# EAGLE board mouthbrain.brd.BASE.36720 (EAGLE 6.4.1)
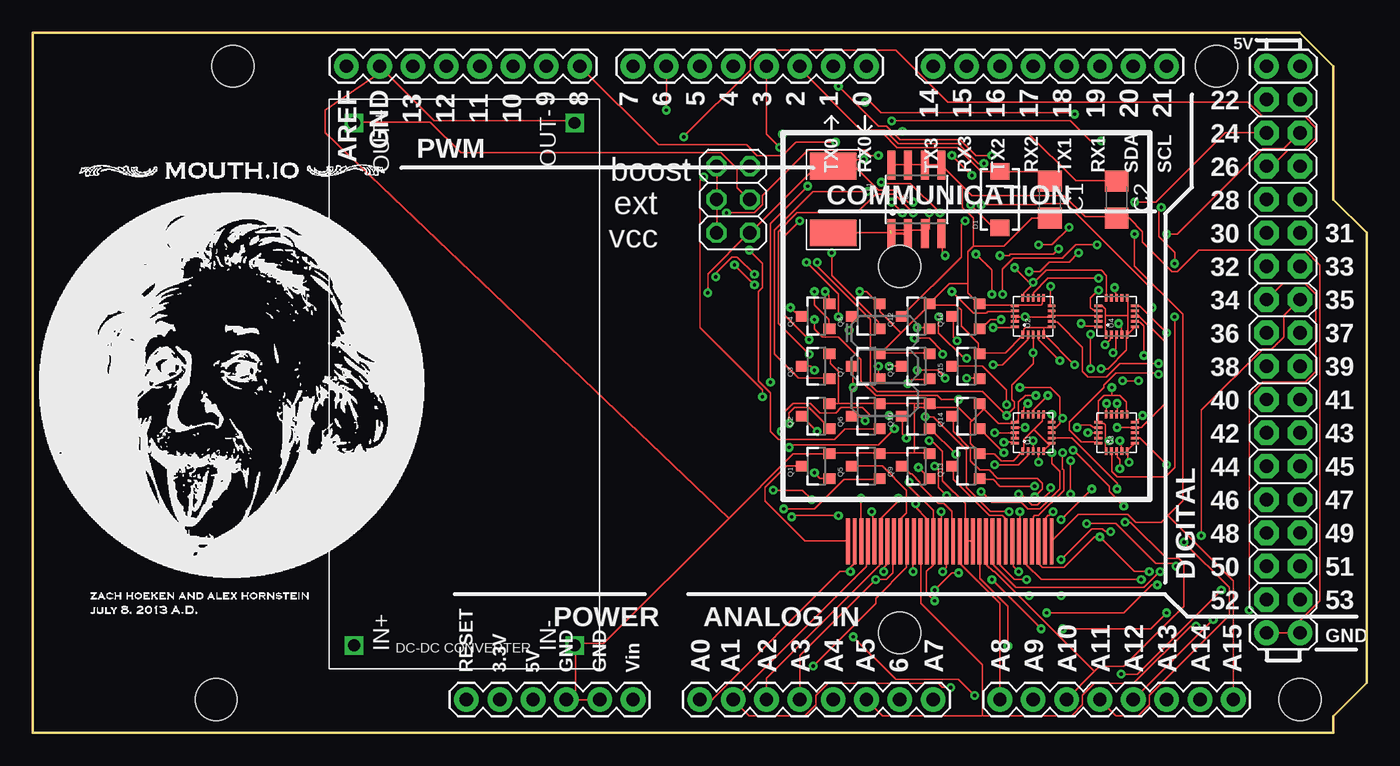
[diagram p0: board, top side]
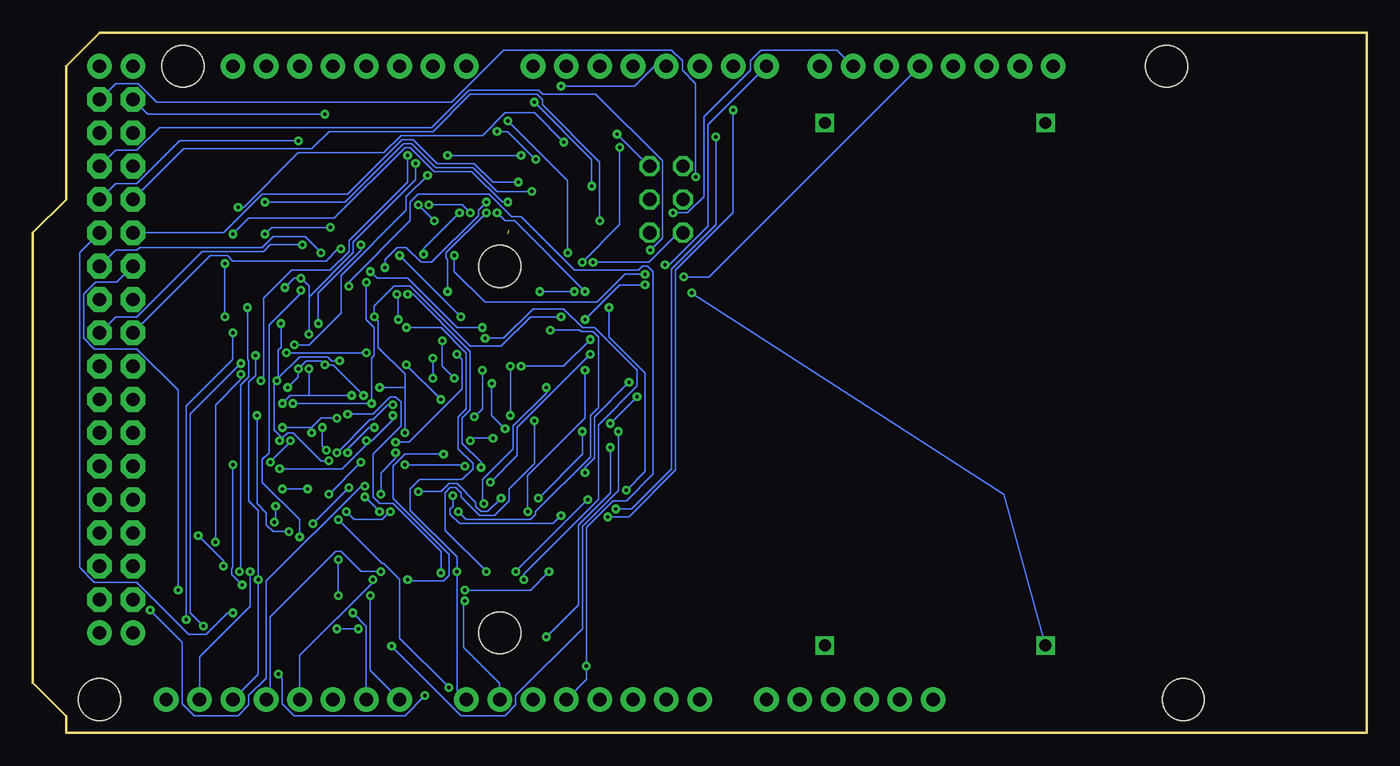
[diagram p1: board, bottom side, seen from below]

Size 101.6 x 53.34 mm. Coordinates in mm from the lower left corner, seen from the top.
Copper layers (1*16): Top 0.035mm / dielectric 1.5mm / Bottom 0.035mm
Design rules "default *": minimum track width 4mil, minimum drill 10mil, track to track 6mil, track to pad 6mil, pad to pad 6mil, via to via 6mil, smd to smd 6mil, copper to edge 40mil, drill to drill 8mil, minimum pad ring 10mil, minimum via ring 8mil, stop-mask expansion 4mil, vias tented up to drill 0mil, thermal gap 10mil

## Footprints (pad centres in the part's own frame; a part is rotated, then mirrored left to right if it is on the bottom)
C1206 = smd 1.6 x 1.8: 1 -1.4,0; 2 1.4,0
SMA-DIODE = smd 1.27 x 1.47: A -2.15,0; C 2.15,0
INDUCTOR-1206 = smd 2.032 x 3.556: P$1 -2.54,0; P$2 2.54,0
ARDUINO_MEGA = drill 1.016 pad 1.88: 0 63.5,50.8; 1 60.96,50.8; 2 58.42,50.8; 3 55.88,50.8; 3.3V 35.56,2.54; 4 53.34,50.8; 5 50.8,50.8; 5V@0 38.1,2.54; 5V@1 93.98,50.8; 5V@2 96.52,50.8; 6 48.26,50.8; 7 45.72,50.8; 8 41.656,50.8; 9 39.116,50.8; 10 36.576,50.8; 11 34.036,50.8; 12 31.496,50.8; 13 28.956,50.8; 14 68.58,50.8; 15 71.12,50.8; 16 73.66,50.8; 17 76.2,50.8; 18 78.74,50.8; 19 81.28,50.8; 20 83.82,50.8; 21 86.36,50.8; A0 50.8,2.54; A1 53.34,2.54; A2 55.88,2.54; A3 58.42,2.54; A4 60.96,2.54; A5 63.5,2.54; A6 66.04,2.54; A7 68.58,2.54; A8 73.66,2.54; A9 76.2,2.54; A10 78.74,2.54; A11 81.28,2.54; A12 83.82,2.54; A13 86.36,2.54; A14 88.9,2.54; A15 91.44,2.54; AREF 23.876,50.8; GND@0 40.64,2.54; GND@1 43.18,2.54; GND@2 93.98,7.62; GND@3 96.52,7.62; GND@4 26.416,50.8; RESET 33.02,2.54; VIN 45.72,2.54 | drill 1.016 pad 1.88 octagon: 22 93.98,48.26; 23 96.52,48.26; 24 93.98,45.72; 25 96.52,45.72; 26 93.98,43.18; 27 96.52,43.18; 28 93.98,40.64; 29 96.52,40.64; 30 93.98,38.1; 31 96.52,38.1; 32 93.98,35.56; 33 96.52,35.56; 34 93.98,33.02; 35 96.52,33.02; 36 93.98,30.48; 37 96.52,30.48; 38 93.98,27.94; 39 96.52,27.94; 40 93.98,25.4; 41 96.52,25.4; 42 93.98,22.86; 43 96.52,22.86; 44 93.98,20.32; 45 96.52,20.32; 46 93.98,17.78; 47 96.52,17.78; 48 93.98,15.24; 49 96.52,15.24; 50 93.98,12.7; 51 96.52,12.7; 52 93.98,10.16; 53 96.52,10.16 | hole 3.2: 15.24,50.8; 13.97,2.54; 66.04,35.56; 66.04,7.62; 90.17,50.8; 96.52,2.54
SOT23-3 = smd 0.8 x 0.9: 1 -0.95,-1; 2 0.95,-1; 3 0,1.1
QFN-20 = smd 0.6 x 0.2: 1 -1.4,0.8; 2 -1.4,0.4; 3 -1.4,0; 4 -1.4,-0.4; 5 -1.4,-0.8; 11 1.4,-0.8; 12 1.4,-0.4; 13 1.4,0; 14 1.4,0.4; 15 1.4,0.8 | smd 0.2 x 0.6: 6 -0.8,-1.4; 7 -0.4,-1.4; 8 0,-1.4; 9 0.4,-1.4; 10 0.8,-1.4; 16 0.8,1.4; 17 0.4,1.4; 18 0,1.4; 19 -0.4,1.4; 20 -0.8,1.4
SO08 = smd 0.61 x 2.21: 1 -1.905,-2.616; 2 -0.635,-2.616; 3 0.635,-2.616; 4 1.905,-2.616; 5 1.905,2.616; 6 0.635,2.616; 7 -0.635,2.616; 8 -1.905,2.616
DC-DC-MODULE = drill 0.9 square: IN+ -19.9,8.4; IN- -19.9,-8.4; OUT+ 19.9,8.4; OUT- 19.9,-8.4
FPC-PCB-32 = smd 0.3 x 3.5: P$1 -7.75,0; P$2 -7.25,0; P$3 -6.75,0; P$4 -6.25,0; P$5 -5.75,0; P$6 -5.25,0; P$7 -4.75,0; P$8 -4.25,0; P$9 -3.75,0; P$10 -3.25,0; P$11 -2.75,0; P$12 -2.25,0; P$13 -1.75,0; P$14 -1.25,0; P$15 -0.75,0; P$16 -0.25,0; P$17 0.25,0; P$18 0.75,0; P$19 1.25,0; P$20 1.75,0; P$21 2.25,0; P$22 2.75,0; P$23 3.25,0; P$24 3.75,0; P$25 4.25,0; P$26 4.75,0; P$27 5.25,0; P$28 5.75,0; P$29 6.25,0; P$30 6.75,0; P$31 7.25,0; P$32 7.75,0
2X03 = drill 1.016 octagon: 1 -2.54,-1.27; 2 -2.54,1.27; 3 0,-1.27; 4 0,1.27; 5 2.54,-1.27; 6 2.54,1.27

## Placement (x,y rotation side)
C1  [C1206]  77.47,40.64 270 top
C2  [C1206]  82.55,40.64 270 top
D1  [SMA-DIODE]  73.66,40.64 90 top
L1  [INDUCTOR-1206]  60.96,40.64 270 top
MEGA  ARDUINO-MEGAFULL  [ARDUINO_MEGA]  0,0 0 top
Q1  MOSFET-NCHANNELSMD  [SOT23-3]  59.69,20.32 90 top
Q2  MOSFET-NCHANNELSMD  [SOT23-3]  59.69,24.13 90 top
Q3  MOSFET-NCHANNELSMD  [SOT23-3]  59.69,27.94 90 top
Q4  MOSFET-NCHANNELSMD  [SOT23-3]  59.69,31.75 90 top
Q5  MOSFET-NCHANNELSMD  [SOT23-3]  63.5,20.32 90 top
Q6  MOSFET-NCHANNELSMD  [SOT23-3]  63.5,24.13 90 top
Q7  MOSFET-NCHANNELSMD  [SOT23-3]  63.5,27.94 90 top
Q8  MOSFET-NCHANNELSMD  [SOT23-3]  63.5,31.75 90 top
Q9  MOSFET-NCHANNELSMD  [SOT23-3]  67.31,20.32 90 top
Q10  MOSFET-NCHANNELSMD  [SOT23-3]  67.31,24.13 90 top
Q11  MOSFET-NCHANNELSMD  [SOT23-3]  67.31,27.94 90 top
Q12  MOSFET-NCHANNELSMD  [SOT23-3]  67.31,31.75 90 top
Q13  MOSFET-NCHANNELSMD  [SOT23-3]  71.12,20.32 90 top
Q14  MOSFET-NCHANNELSMD  [SOT23-3]  71.12,24.13 90 top
Q15  MOSFET-NCHANNELSMD  [SOT23-3]  71.12,27.94 90 top
Q16  MOSFET-NCHANNELSMD  [SOT23-3]  71.12,31.75 90 top
U1  MCP4352  [QFN-20]  76.2,22.86 90 top
U2  MCP4352  [QFN-20]  76.2,31.75 90 top
U3  MCP4352  [QFN-20]  82.55,22.86 90 top
U4  MCP4352  [QFN-20]  82.55,31.75 90 top
U5  MOSFET-NCHANNEL-SOIC8  [SO08]  67.31,40.64 0 top
U$1  DC-DC-CONVERTER  [DC-DC-MODULE]  32.87,26.57 90 top
U$2  FPC-0.5-32  [FPC-PCB-32]  69.85,14.61 0 top
VDD  [2X03]  53.34,40.64 90 top

## Library data of the parts
C1 C2 = rcl
D1 L1 MEGA Q1-Q16 U5 = SparkFun
U1-U4 = mouthbrain
U$1 U$2 = Hoektronics
VDD = pinhead

## Nets
!CS1: MEGA.6 U1.2
!CS2: MEGA.7 U2.2
!CS3: MEGA.8 U3.2
!CS4: MEGA.9 U4.2
!RESET: MEGA.2 U1.13 U2.13 U3.13 U4.13
AOUT0: MEGA.A0 U1.10 U$2.P$2
AOUT1: MEGA.A1 U1.7 U$2.P$4
AOUT2: MEGA.A2 U1.17 U$2.P$6
AOUT3: MEGA.A3 U1.20 U$2.P$8
AOUT4: MEGA.A4 U2.10 U$2.P$10
AOUT5: MEGA.A5 U2.7 U$2.P$12
AOUT6: MEGA.A6 U2.17 U$2.P$14
AOUT7: MEGA.A7 U2.20 U$2.P$16
AOUT8: MEGA.A8 U3.10 U$2.P$18
AOUT9: MEGA.A9 U3.7
AOUT10: MEGA.A10 U3.17 U$2.P$22
AOUT11: MEGA.A11 U3.20 U$2.P$24
AOUT12: MEGA.A12 U4.10 U$2.P$26
AOUT13: MEGA.A13 U4.7 U$2.P$28
AOUT14: MEGA.A14 U4.17 U$2.P$30
AOUT15: MEGA.A15 U4.20 U$2.P$32
BOOST: C1.1 D1.C VDD.5
BOOST_FET: MEGA.11 U5.4
CIN0: MEGA.22 Q1.1
CIN1: MEGA.23 Q2.1
CIN2: MEGA.24 Q3.1
CIN3: MEGA.25 Q4.1
CIN4: MEGA.26 Q5.1
CIN5: MEGA.27 Q6.1
CIN6: MEGA.28 Q7.1
CIN7: MEGA.29 Q8.1
CIN8: MEGA.30 Q9.1
CIN9: MEGA.31 Q10.1
CIN10: MEGA.32 Q11.1
CIN11: MEGA.33 Q12.1
CIN12: MEGA.34 Q13.1
CIN13: MEGA.35 Q14.1
CIN14: MEGA.36 Q15.1
CIN15: MEGA.37 Q16.1
COUT0: Q1.3 U$2.P$1
COUT1: Q2.3 U$2.P$3
COUT2: Q3.3 U$2.P$5
COUT3: Q4.3 U$2.P$7
COUT4: Q5.3 U$2.P$9
COUT5: Q6.3 U$2.P$11
COUT6: Q7.3 U$2.P$13
COUT7: Q8.3 U$2.P$15
COUT8: Q9.3 U$2.P$17
COUT9: Q10.3 U$2.P$19 U$2.P$20
COUT10: Q11.3 U$2.P$21
COUT11: Q12.3 U$2.P$23
COUT12: Q13.3 U$2.P$25
COUT13: Q14.3 U$2.P$27
COUT14: Q15.3 U$2.P$29
COUT15: Q16.3 U$2.P$31
EXT: U$1.OUT+ VDD.3
GND: C1.2 C2.2 MEGA.GND@0 MEGA.GND@1 MEGA.GND@2 MEGA.GND@3 MEGA.GND@4 Q1.2 Q2.2 Q3.2 Q4.2 Q5.2 Q6.2 Q7.2 Q8.2 Q9.2 Q10.2 Q11.2 Q12.2 Q13.2 Q14.2 Q15.2 Q16.2 U1.1 U1.5 U1.6 U1.11 U1.16 U2.1 U2.5 U2.6 U2.11 U2.16 U3.1 U3.5 U3.6 U3.11 U3.16 U4.1 U4.5 U4.6 U4.11 U4.16 U5.5 U5.6 U5.7 U5.8 U$1.IN- U$1.OUT-
N$1: D1.A L1.P$2 U5.1 U5.2 U5.3
SCK: MEGA.3 U1.3 U2.3 U3.3 U4.3
SI: MEGA.4 U1.4 U2.4 U3.4 U4.4
SO: MEGA.5
VCC: C2.1 L1.P$1 U1.15 U2.15 U3.15 U4.15 U$1.IN+ VDD.1
VDD: U1.8 U1.9 U1.18 U1.19 U2.8 U2.9 U2.18 U2.19 U3.8 U3.9 U3.18 U3.19 U4.8 U4.9 U4.18 U4.19 VDD.2 VDD.4 VDD.6

## Tracks (layer width: path | path; a pad name or v marks a point on that pad's centre or on a via)
!CS1  (via drill 0.25)
  Top 0.102: v73.25,20.42 75.08,20.42 75.79,21.13 75.79,21.44 U1.2 | v68.68,20.32 68.99,20.02 68.99,18.69 v69.6,18.09 | v61.37,16.56 57.91,16.56 v57.81,16.46 | MEGA.6 v48.26,47.45
  Bottom 0.102: v73.25,20.42 68.78,20.42 v68.68,20.32 | v69.6,18.09 69.6,17.27 69.8,17.07 69.8,16.66 69.09,15.95 61.98,15.95 v61.37,16.56 | v57.81,16.46 56.19,16.46 52.63,20.02 52.63,35.26 48.26,39.62 v48.26,47.45
!CS2  (via drill 0.25)
  Top 0.102: v73.15,28.04 73.86,28.04 75.79,29.97 75.79,30.28 U2.2 | v70.51,25.4 69.19,25.4 68.89,25.71 64.21,25.71 63.09,26.82 63.09,28.45 61.37,30.18 60.15,30.18 59.54,30.79 v59.54,31.5 | v53.44,35.66 v54.97,34.14
  Bottom 0.102: v70.51,25.4 v73.15,28.04 | v59.54,31.5 56.9,34.14 v54.97,34.14 | v53.44,35.66 53.14,35.66 50.19,38.61 50.19,46.33 MEGA.7
!CS3  (via drill 0.25)
  Top 0.102: v86.97,31.7 86.97,20.22 86.26,19.51 82.6,19.51 82.19,19.91 82.19,21.44 U3.2 | v86.97,35.76 86.97,36.58 85.75,37.8 85.75,39.83 v85.95,40.03 | v61.16,45.01 58.12,45.01 57.1,43.99 55.17,43.99 54.36,44.81 47.65,44.81 MEGA.8
  Bottom 0.102: v86.97,35.76 v86.97,31.7 | v85.95,40.03 85.55,40.03 81.38,44.2 74.88,44.2 73.56,45.52 67.36,45.52 65.63,47.24 63.4,47.24 v61.16,45.01
!CS4  (via drill 0.25)
  Top 0.102: v81.69,29.57 82.09,29.97 82.09,30.28 U4.2 | v70,43.99 v71.53,42.47 | v64.41,43.99 63.8,43.99 63.4,44.4 59.03,44.4 55.58,40.95 55.58,40.23 54.97,39.62 v52.83,39.62
  Bottom 0.102: v81.69,29.57 80.57,29.57 78.13,32 78.13,34.85 73.15,39.83 73.15,40.84 v71.53,42.47 | v64.41,43.99 v70,43.99 | v52.83,39.62 51.71,39.62 50.49,40.84 50.49,46.94 46.94,50.49 46.94,51.21 46.13,52.02 40.34,52.02 MEGA.9
!RESET  (via drill 0.25)
  Top 0.102: v77.32,25.71 76.2,24.59 76.2,24.28 U1.13 | v82.6,25.1 82.6,24.28 U3.13 | v81.18,34.65 77.32,34.65 76.2,33.53 76.2,33.22 U2.13 | v82.4,33.93 82.4,33.63 82.5,33.53 82.5,33.22 U4.13 | v80.57,30.38 v80.57,27.74 | MEGA.2 58.42,50.6 63.09,45.92 64.92,45.92 65.94,44.91 70.51,44.91 72.03,43.38 v72.44,43.38
  Bottom 0.102: 80.57,25.71 81.99,25.71 v82.6,25.1 | 80.57,25.71 v77.32,25.71 | v82.4,33.93 81.69,34.65 v81.18,34.65 80.57,34.04 80.57,33.22 | v80.57,27.74 80.57,25.71 | 80.57,33.22 v80.57,30.38 | v72.44,43.38 72.44,42.16 77.22,37.39 77.22,36.58 80.57,33.22
AOUT0  (via drill 0.25)
  Top 0.102: v77.62,24.28 77.62,23.67 U1.10 | v70.51,12.19 70,12.19 v68.68,10.87 | U$2.P$2 62.59,14.53 62.59,12.9 62.28,12.6 v62.28,12.29 61.47,12.29 51.71,2.54 MEGA.A0
  Bottom 0.102: v77.62,24.28 75.69,24.28 74.37,25.6 73.97,25.6 73.56,25.2 73.56,23.37 75.69,21.23 75.69,17.98 75.18,17.48 74.17,17.48 70.51,13.82 v70.51,12.19 | v68.68,10.87 63.7,10.87 v62.28,12.29
AOUT1  (via drill 0.25)
  Top 0.102: v82.6,18.59 82.6,19 79.15,22.45 77.62,22.45 U1.7 | v78.33,16.26 v80.67,18.59 | v69.9,3.45 69.29,3.45 68.99,3.76 60.55,3.76 59.64,2.84 59.64,2.13 58.83,1.32 54.56,1.32 MEGA.A1 63.5,12.7 63.5,14.53 U$2.P$4
  Bottom 0.102: v80.67,18.59 v82.6,18.59 | v78.33,16.26 74.98,12.9 74.88,12.9 73.66,11.68 73.66,7.21 v69.9,3.45
AOUT2  (via drill 0.25)
  Top 0.102: v75.59,23.27 74.88,23.27 U1.17 | v77.62,21.34 77.62,20.52 78.23,19.91 78.23,18.59 76.71,17.07 75.79,17.07 75.29,17.58 73.05,17.58 v72.24,18.39 | v65.94,17.88 65.94,17.68 64.62,16.36 64.62,14.63 U$2.P$6 64.52,14.53 64.52,12.8 55.88,4.17 MEGA.A2
  Bottom 0.102: v75.59,23.27 76,23.27 77.62,21.64 v77.62,21.34 | v72.24,18.39 70.51,18.39 69.9,19 69.29,19 67.87,17.58 67.87,17.27 67.46,16.87 66.95,16.87 v65.94,17.88
AOUT3  (via drill 0.25)
  Top 0.102: v73.97,22.15 74.78,22.15 U1.20 | v69.29,28.85 69.29,29.06 68.28,30.07 v67.16,30.07 | U$2.P$8 65.53,14.53 65.53,12.19 65.02,11.68 v64.21,11.68 58.42,5.89 MEGA.A3
  Bottom 0.102: v73.97,22.15 72.95,22.15 68.89,26.21 68.89,28.45 v69.29,28.85 | v67.16,30.07 65.73,30.07 63.5,32.31 61.16,32.31 59.74,30.89 58.83,30.89 55.58,27.64 55.58,26.42 58.52,23.47 58.52,17.78 64.21,12.09 v64.21,11.68
AOUT4  (via drill 0.25)
  Top 0.102: v77.52,34.04 77.52,32.61 U2.10 | v59.44,5.08 64.21,9.86 64.21,10.26 66.55,12.6 66.55,14.53 U$2.P$10
  Bottom 0.102: v77.52,34.04 77.52,34.34 72.85,39.01 72.85,40.44 72.24,41.05 66.85,41.05 65.13,39.32 64.41,39.32 60.35,35.26 55.47,35.26 55.17,35.56 54.76,35.56 54.36,35.15 54.36,19.71 56.39,17.68 57.4,17.68 59.44,15.65 v59.44,5.08 59.44,4.06 MEGA.A4
AOUT5  (via drill 0.25)
  Top 0.102: v85.75,28.14 82.8,28.14 81.79,27.13 80.37,27.13 79.96,27.53 79.96,29.36 78.03,31.29 77.62,31.29 U2.7 | v88.59,8.13 88.19,8.13 83.82,3.76 80.87,3.76 79.96,2.84 79.96,2.13 79.15,1.32 72.34,1.32 | 72.34,1.32 64.72,1.32 MEGA.A5 | 72.34,1.32 72.34,5.18 67.67,9.86 67.67,14.53 U$2.P$12
  Bottom 0.102: v85.75,28.14 89.61,24.28 89.61,9.14 v88.59,8.13
AOUT6  (via drill 0.25)
  Top 0.102: v70,33.63 71.63,32 72.64,32 72.75,32.11 74.78,32.11 U2.17 | v67.06,39.62 65.63,41.05 64.21,41.05 62.79,39.62 58.22,39.62 56.79,38.2 56.79,31.19 v59.13,28.85 | v66.75,19.1 66.75,18.8 68.58,16.97 68.58,14.63 U$2.P$14 68.58,14.53 68.58,12.8 68.07,12.29 68.07,10.67 v68.68,10.06
  Bottom 0.102: v70,33.63 70,36.07 70.1,36.17 70.1,36.58 v67.06,39.62 | v59.13,28.85 64.72,23.27 64.72,21.13 v66.75,19.1 | MEGA.A6 66.04,3.76 68.78,6.5 68.78,9.96 v68.68,10.06
AOUT7  (via drill 0.25)
  Top 0.102: v73.15,30.89 74.78,30.89 U2.20 | v69.29,12.29 69.6,12.6 69.6,14.53 U$2.P$16
  Bottom 0.102: v73.15,30.89 70.51,30.89 68.58,28.96 68.58,24.69 69.19,24.08 69.19,21.64 68.07,20.52 68.07,20.12 68.89,19.3 72.14,19.3 72.85,18.59 72.85,16.97 69.29,13.41 v69.29,12.29 69.29,3.25 MEGA.A7
AOUT8  (via drill 0.25)
  Top 0.102: v84.53,24.18 84.02,23.67 U3.10 | v82.09,15.34 81.69,15.34 81.48,15.55 80.67,15.55 v78.33,13.21 | v75.89,10.46 v78.33,10.46 | MEGA.A8 73.66,9.86 70.61,12.9 70.61,14.53 U$2.P$18
  Bottom 0.102: v84.53,24.18 84.53,17.48 83.82,16.76 83.82,15.85 83.31,15.34 v82.09,15.34 | v78.33,10.46 v78.33,13.21 | v75.89,10.46 75.89,4.78 MEGA.A8
AOUT9  (via drill 0.25)
  Top 0.102: v86.36,20.42 84.33,22.45 84.02,22.45 U3.7 | v85.65,11.28 85.24,11.28 83.11,9.14 v77.22,9.14
  Bottom 0.102: v86.36,20.42 86.36,12.6 86.46,12.5 86.46,12.09 v85.65,11.28 | v77.22,9.14 76.2,8.13 MEGA.A9
AOUT10  (via drill 0.25)
  Top 0.102: v79.55,23.27 79.76,23.47 80.57,23.47 80.77,23.27 81.08,23.27 U3.17 | v79.25,21.54 81.99,18.8 81.99,18.39 v83.11,17.27 | v83.21,16.05 83.62,16.05 86.36,13.31 87.27,13.31 87.68,12.9 87.68,9.65 83.11,5.08 81.28,5.08 80.87,4.67 | MEGA.A10 80.87,4.67 | 80.87,4.67 73.25,12.29 73.15,12.29 72.64,12.8 72.64,14.53 U$2.P$22
  Bottom 0.102: v79.55,23.27 79.55,21.84 v79.25,21.54 | v83.11,17.27 83.11,16.15 v83.21,16.05
AOUT11  (via drill 0.25)
  Top 0.102: v85.75,27.33 85.65,27.43 82.5,27.43 81.58,26.52 81.58,26.31 78.94,23.67 78.94,23.06 79.86,22.15 81.08,22.15 U3.20 | v87.68,14.53 91.14,11.07 91.14,8.94 85.04,2.84 85.04,2.13 84.23,1.32 82.5,1.32 MEGA.A11 | v75.69,11.68 74.78,11.68 73.66,12.8 73.66,14.53 U$2.P$24
  Bottom 0.102: v85.75,27.33 85.75,26.92 87.68,24.99 v87.68,14.53 | v75.69,11.68 75.69,11.48 81.28,5.89 MEGA.A11
AOUT12  (via drill 0.25)
  Top 0.102: v86.36,30.48 84.33,32.51 84.02,32.51 U4.10 | MEGA.A12 v89.92,8.64 | v75.08,12.29 74.68,12.7 74.68,14.53 U$2.P$26
  Bottom 0.102: v86.36,30.48 86.36,28.45 89.92,24.89 v89.92,8.64 | v75.08,12.29 76.61,12.29 78.13,13.82 78.54,13.82 83.52,8.84 83.52,2.84 MEGA.A12
AOUT13  (via drill 0.25)
  Top 0.102: v84.63,28.75 84.63,30.99 84.33,31.29 84.02,31.29 U4.7 | v84.43,11.68 76.81,11.68 75.69,12.8 75.69,14.53 U$2.P$28
  Bottom 0.102: v84.63,28.75 84.63,27.23 85.14,26.72 85.14,17.68 84.43,16.97 v84.43,11.68 84.43,4.47 MEGA.A13
AOUT14  (via drill 0.25)
  Top 0.102: v81.18,33.73 80.57,33.12 80.57,32.41 80.77,32.21 81.08,32.21 U4.17 | U$2.P$30 76.61,14.53 76.61,12.9 76.91,12.6 78.54,12.6 80.87,14.94 v81.28,14.94 83.92,12.29 v85.04,12.29
  Bottom 0.102: v81.18,33.73 81.18,33.53 83.62,31.09 83.62,21.34 84.12,20.83 84.12,19.1 81.28,16.26 v81.28,14.94 | MEGA.A14 88.9,5.79 85.04,9.65 v85.04,12.29
AOUT15  (via drill 0.25)
  Top 0.102: v79.86,31.19 80.06,30.99 81.08,30.99 U4.20 | v76.61,37.19 77.62,37.19 v78.94,38.51 | v83.92,38 83.92,35.56 87.58,31.9 87.58,17.68 86.46,16.56 | 86.46,16.56 85.95,16.05 84.02,16.05 83.41,16.66 79.65,16.66 77.62,14.63 U$2.P$32 | MEGA.A15 91.44,11.58 86.46,16.56
  Bottom 0.102: v79.86,31.19 79.86,33.53 76.61,36.78 v76.61,37.19 | v78.94,38.51 83.41,38.51 v83.92,38
BOOST  (via drill 0.25)
  Top 0.102: 73.66,42.77 76.71,42.77 77.42,42.06 C1.1 | 73.66,42.77 D1.C 73.66,42.77 | v57.1,45.62 64.82,45.62 65.84,44.6 70.41,44.6 72.24,42.77 73.66,42.77
  Bottom 0.102: v57.1,45.62 54.66,43.18 VDD.5
BOOST_FET  (via drill 0.25)
  Top 0.102: v69.49,36.37 69.29,36.58 69.29,38 U5.4 | v54.97,34.95 53.65,36.27 53.24,36.27 52.02,35.05 v52.02,34.75
  Bottom 0.102: v69.49,36.37 69.49,35.15 67.16,32.82 58.62,32.82 56.49,34.95 v54.97,34.95 | v52.02,34.75 50.09,34.75 MEGA.11
CIN0  (via drill 0.25)
  Top 0.102: v59.54,19.81 59.94,19.41 60.66,19.41 Q1.1 | v56.19,26.72 56.19,38.81 v59.03,41.66 | v63.4,48.06 63.8,48.06 64.62,47.24 79.25,47.24 v79.35,47.14
  Bottom 0.102: v59.54,19.81 59.54,20.22 58.83,20.93 58.83,24.08 v56.19,26.72 | v59.03,41.66 59.03,43.69 v63.4,48.06 | v79.35,47.14 92.86,47.14 MEGA.22
CIN1  (via drill 0.25)
  Top 0.102: v57.61,23.57 57.61,24.38 58.01,24.79 59.13,24.79 60.66,23.27 Q2.1 | v55.58,25.6 55.58,26.11 50.8,30.89 50.8,42.06 v51.1,42.37
  Bottom 0.102: v55.58,25.6 v57.61,23.57 | v51.1,42.37 51.1,49.48 52.12,50.49 52.12,51.21 52.93,52.02 65.73,52.02 69.7,48.06 92.15,48.06 93.57,49.48 95.3,49.48 MEGA.23
CIN2  (via drill 0.25)
  Top 0.102: v63.6,41.25 59.44,41.25 56.49,38.3 56.49,28.85 58.32,27.03 60.66,27.03 Q3.1 | v83.92,40.44 85.55,40.44 90.83,45.72 MEGA.24
  Bottom 0.102: v63.6,41.25 66.24,41.25 68.07,43.08 70.92,43.08 72.75,44.91 73.36,44.91 77.83,40.44 v83.92,40.44
CIN3  (via drill 0.25)
  Top 0.102: v59.54,33.63 59.54,32.61 60.66,31.5 60.66,30.89 Q4.1 | v65.43,40.44 v66.24,39.62 | v86.36,38 87.17,38 93.67,44.5 95.3,44.5 MEGA.25
  Bottom 0.102: v59.54,33.63 64.92,39.01 65.63,39.01 v66.24,39.62 | v65.43,40.44 65.84,40.44 68.17,42.77 71.02,42.77 72.85,44.6 73.25,44.6 78.64,39.22 85.14,39.22 v86.36,38
CIN4  (via drill 0.25)
  Top 0.102: v57.2,17.07 59.54,17.07 61.77,19.3 64.41,19.3 Q5.1 | v49.58,45.41 54.66,50.49 54.66,51.21 55.47,52.02 65.73,52.02 69.7,48.06 92.56,48.06 93.67,46.94 96.93,46.94 97.74,46.13 97.74,45.31 96.83,44.4 95.61,44.4 94.39,43.18 MEGA.26
  Bottom 0.102: v57.2,17.07 55.98,17.07 52.93,20.12 52.93,35.36 49.58,38.71 v49.58,45.41
CIN5  (via drill 0.25)
  Top 0.102: v54.56,36.78 55.58,35.76 55.58,33.93 55.27,33.63 55.27,26.82 56.19,25.91 56.19,22.96 56.79,22.35 61.06,22.35 61.87,23.16 64.41,23.16 Q6.1
  Bottom 0.102: v54.56,36.78 53.65,37.69 53.65,43.59 58.73,48.67 62.79,48.67 63.09,48.97 68.38,48.97 71.22,46.13 91.95,46.13 93.67,44.4 95.3,44.4 MEGA.27
CIN6  (via drill 0.25)
  Top 0.102: v64.41,27.94 64.41,27.03 Q7.1 | v59.13,29.97 57.1,32 57.1,37.69 v58.42,39.01
  Bottom 0.102: v64.41,27.94 61.16,27.94 v59.13,29.97 | v58.42,39.01 58.42,43.48 62.79,47.85 62.79,48.26 63.2,48.67 68.28,48.67 71.12,45.82 79.05,45.82 80.37,44.5 90.12,44.5 MEGA.28
CIN7  (via drill 0.25)
  Top 0.102: v60.86,36.58 60.86,34.85 64.41,31.29 64.41,30.89 Q8.1 | v65.43,46.63 79.05,46.63 80.57,45.11 v81.38,45.11
  Bottom 0.102: v60.86,36.58 60.86,42.06 v65.43,46.63 | v81.38,45.11 90.42,45.11 93.67,41.86 95.3,41.86 MEGA.29
CIN8  (via drill 0.25)
  Top 0.102: v67.46,20.22 68.28,19.41 Q9.1 | v73.05,33.43 73.05,35.26 v71.83,36.47 | v69.09,39.62 66.85,41.86 64.72,41.86 v64.62,41.96
  Bottom 0.102: v67.46,20.22 67.46,20.62 68.89,22.05 68.89,23.98 68.28,24.59 68.28,29.06 72.64,33.43 v73.05,33.43 | v71.83,36.47 71.83,36.88 v69.09,39.62 | v64.62,41.96 66.55,41.96 67.97,43.38 70.81,43.38 72.64,45.21 73.46,45.21 77.62,41.05 84.12,41.05 87.07,38.1 MEGA.30
CIN9  (via drill 0.25)
  Top 0.102: v70.31,21.23 68.38,23.16 Q10.1 | v76.81,7.92 v73.05,11.68 | v78.44,7.92 85.14,7.92 v86.36,9.14
  Bottom 0.102: v70.31,21.23 73.25,21.23 74.17,20.32 74.17,17.88 69.9,13.61 69.9,11.99 70.31,11.58 72.95,11.58 v73.05,11.68 | v78.44,7.92 v76.81,7.92 | v86.36,9.14 86.77,9.14 88.39,7.52 89.71,7.52 93.67,11.48 96.93,11.48 98.04,12.6 98.04,36.58 MEGA.31
CIN10  (via drill 0.25)
  Top 0.102: v66.65,26.62 66.95,26.92 68.28,26.92 Q11.1 | v65.63,23.16 64.41,21.95 57.81,21.95 v57.61,21.74 | v62.48,7.32 65.73,4.06 70.51,4.06 v71.73,2.84 | v82.91,4.47 84.12,4.47 v90.53,10.87
  Bottom 0.102: v66.65,26.62 66.65,24.18 v65.63,23.16 | v57.61,21.74 57.61,18.29 60.05,15.85 60.05,9.75 v62.48,7.32 | v71.73,2.84 73.25,1.32 81.69,1.32 82.6,2.24 82.6,4.17 v82.91,4.47 | v90.53,10.87 90.53,26.11 93.67,29.26 96.93,29.26 97.74,30.07 97.74,33.43 96.83,34.34 95.2,34.34 MEGA.32
CIN11  (via drill 0.25)
  Top 0.102: v67.36,30.89 68.28,30.89 Q12.1 | v75.89,35.15 76.71,35.15 77.42,35.87 78.94,35.87 v79.65,36.58
  Bottom 0.102: v67.36,30.89 69.29,30.89 73.05,34.65 75.39,34.65 v75.89,35.15 | v79.65,36.58 80.87,37.8 83.31,37.8 84.12,36.98 93.47,36.98 93.67,36.78 95.3,36.78 MEGA.33
CIN12  (via drill 0.25)
  Top 0.102: v76.3,18.8 73.66,18.8 73.15,19.3 72.14,19.3 Q13.1 | v92.66,9.35 92.66,25.71 93.67,26.72 96.93,26.72 97.74,27.53 97.74,33.43 96.93,34.24 95.2,34.24 MEGA.34
  Bottom 0.102: v76.3,18.8 76.61,18.8 83.82,11.58 83.82,4.17 85.14,2.84 85.14,2.13 85.95,1.32 89.31,1.32 90.22,2.24 90.22,6.91 v92.66,9.35
CIN13  (via drill 0.25)
  Top 0.102: v73.97,21.34 72.14,23.16 Q14.1 | v75.08,18.19 75.29,18.19 76.1,17.37 76.5,17.37 77.52,18.39 v77.52,18.69 | v80.26,15.95 82.5,15.95 85.55,12.9 86.87,12.9 v87.07,12.7 | v89,15.04 89,24.59 93.67,29.26 94.39,29.26 95.3,30.18 95.3,31.8 MEGA.35
  Bottom 0.102: v73.97,21.34 73.97,20.93 75.08,19.81 v75.08,18.19 | v80.26,15.95 v77.52,18.69 | v87.07,12.7 87.07,13.11 v89,15.04
CIN14  (via drill 0.25)
  Top 0.102: v71.12,27.03 72.03,27.03 Q15.1 | v71.12,28.55 70.92,28.55 68.99,30.48 v68.99,31.7 | v73.66,36.37 74.37,36.37 74.47,36.47 77.72,36.47 v78.13,36.88
  Bottom 0.102: v71.12,28.55 v71.12,27.03 | v73.66,36.37 v68.99,31.7 | v78.13,36.88 78.33,36.88 79.25,35.97 86.36,35.97 86.77,36.37 88.09,36.37 MEGA.36
CIN15  (via drill 0.25)
  Top 0.102: v73.76,31.5 72.95,31.5 72.34,30.89 72.14,30.89 Q16.1 | v73.86,33.43 73.86,35.36 74.68,36.17 78.44,36.17 79.45,37.19 v81.08,37.19
  Bottom 0.102: v73.76,31.5 73.76,33.33 v73.86,33.43 | v81.08,37.19 83.52,37.19 84.02,36.68 88.7,36.68 93.67,31.7 95.3,31.7 MEGA.37
COUT0
  Top 0.102: Q1.3 58.52,20.32 57.4,20.32 55.78,18.69 55.78,17.68 58.83,14.63 62.08,14.63 U$2.P$1
COUT1  (via drill 0.25)
  Top 0.102: v59.74,22.96 58.62,24.08 Q2.3 | v63.09,17.88 63.09,14.63 U$2.P$3
  Bottom 0.102: v59.74,22.96 59.74,21.23 v63.09,17.88
COUT2  (via drill 0.25)
  Top 0.102: v59.54,27.64 59.23,27.94 58.62,27.94 Q3.3 | v63.91,16.87 63.91,16.56 64.01,16.46 64.01,14.63 U$2.P$5
  Bottom 0.102: v59.54,27.64 59.54,23.98 63.91,19.61 v63.91,16.87
COUT3  (via drill 0.25)
  Top 0.102: v57.71,32.41 58.32,31.8 58.52,31.8 Q4.3 | v56.39,18.49 58.62,18.49 v59.33,17.78 | v64.82,12.29 64.82,12.6 65.02,12.8 65.02,14.53 U$2.P$7
  Bottom 0.102: v57.71,32.41 57.71,30.18 54.97,27.43 54.97,19.91 v56.39,18.49 | v64.82,12.29 v59.33,17.78
COUT4
  Top 0.102: Q5.3 62.48,20.32 64.72,20.32 66.55,18.49 66.55,16.76 66.14,16.36 66.14,14.63 U$2.P$9
COUT5  (via drill 0.25)
  Top 0.102: v63.4,23.77 63.09,24.08 62.48,24.08 Q6.3 | v67.06,12.29 67.06,14.53 U$2.P$11
  Bottom 0.102: v63.4,23.77 63.4,20.52 65.33,18.59 65.33,17.68 66.45,16.56 67.56,16.56 68.99,17.98 68.99,18.29 69.39,18.69 69.8,18.69 70.21,18.29 70.21,15.44 v67.06,12.29
COUT6  (via drill 0.25)
  Top 0.102: v62.48,26.31 62.48,27.94 Q7.3 | v67.26,17.48 67.26,17.17 68.07,16.36 68.07,14.63 U$2.P$13
  Bottom 0.102: v62.48,26.31 62.48,25.91 65.02,23.37 65.02,21.64 67.36,19.3 67.36,17.58 v67.26,17.48
COUT7  (via drill 0.25)
  Top 0.102: v62.18,30.68 62.38,30.89 62.38,31.7 Q8.3 | v69.19,16.87 69.19,14.63 U$2.P$15
  Bottom 0.102: v62.18,30.68 59.94,30.68 59.84,30.58 58.93,30.58 58.52,30.18 58.52,24.79 59.13,24.18 59.13,21.03 63.3,16.87 63.3,16.66 63.7,16.26 68.58,16.26 v69.19,16.87
COUT8
  Top 0.102: Q9.3 66.24,20.32 66.85,19.71 66.95,19.71 67.56,19.1 67.56,18.9 68.99,17.48 69.39,17.48 70,16.87 70,14.63 U$2.P$17
COUT9  (via drill 0.25)
  Top 0.102: v66.55,22.45 66.24,22.76 66.24,24.08 Q10.3 | v68.28,22.25 68.48,22.25 69.29,21.44 69.29,19.2 71.02,17.48 71.02,14.63 U$2.P$19 71.12,14.63 71.53,14.63 U$2.P$20
  Bottom 0.102: v66.55,22.45 68.07,22.45 v68.28,22.25
COUT10  (via drill 0.25)
  Top 0.102: v65.23,27.94 66.14,27.94 Q11.3 | v65.23,24.18 63.8,24.18 63.2,24.79 61.57,24.79 61.16,24.38 59.94,24.38 59.23,25.1 57.91,25.1 57,24.18 v57,22.96 | v74.27,6.6 74.27,9.65 72.14,11.79 72.14,14.53 U$2.P$21
  Bottom 0.102: v65.23,24.18 v65.23,27.94 | v57,22.96 57,18.49 59.74,15.75 59.74,7.92 64.82,2.84 64.82,2.13 65.63,1.32 68.99,1.32 v74.27,6.6
COUT11  (via drill 0.25)
  Top 0.102: v71.02,39.01 70.71,38.71 70.71,36.27 66.24,31.8 Q12.3 | v72.24,40.23 76.4,40.23 76.5,40.34 78.74,40.34 85.24,33.83 v85.24,32.41 | v85.85,12.29 84.63,11.07 74.88,11.07 73.15,12.8 73.15,14.53 U$2.P$23
  Bottom 0.102: v72.24,40.23 v71.02,39.01 | v85.24,32.41 85.24,28.45 85.14,28.35 85.14,27.13 85.75,26.52 85.75,12.39 v85.85,12.29
COUT12
  Top 0.102: Q13.3 70.1,20.32 70.1,19.3 72.85,16.56 73.86,16.56 74.07,16.36 74.07,14.63 U$2.P$25
COUT13  (via drill 0.25)
  Top 0.102: v76.3,17.98 76.91,18.59 76.91,19 76.5,19.41 73.46,19.41 72.85,20.02 72.14,20.02 71.42,20.73 71.42,21.64 70.1,22.96 70.1,24.08 Q14.3 | v75.18,16.87 75.18,14.63 U$2.P$27
  Bottom 0.102: v75.18,16.87 v76.3,17.98
COUT14  (via drill 0.25)
  Top 0.102: v74.17,24.99 74.17,26.11 72.34,27.94 70.1,27.94 Q15.3 | v78.44,21.34 78.44,20.12 78.54,20.02 78.54,18.49 76.61,16.56 76.3,16.56 76.2,16.46 76.2,14.63 U$2.P$29
  Bottom 0.102: v74.17,24.99 74.57,24.99 75.69,23.88 75.89,23.88 v78.44,21.34
COUT15  (via drill 0.25)
  Top 0.102: v70.41,29.87 70.1,30.18 70.1,31.7 Q16.3 | v69.49,27.03 68.89,27.64 v67.36,27.64 | v67.97,24.08 68.58,24.08 71.12,21.54 71.12,18.69 72.95,16.87 v74.37,16.87 | v77.72,16.87 77.42,16.56 77.32,16.56 77.11,16.36 77.11,14.63 U$2.P$31
  Bottom 0.102: v70.41,29.87 70.41,27.94 v69.49,27.03 | v67.36,27.64 67.36,24.69 v67.97,24.08 | v74.37,16.87 74.98,16.26 77.11,16.26 v77.72,16.87
EXT
  Top 0.102: U$1.OUT+ 24.69,46.53 30.28,46.53 32.61,44.2 52.43,44.2 53.65,42.98 53.65,41.55 54.56,40.64 VDD.3
GND  (via drill 0.25)
  Top 0.102: 81.69,31.8 81.69,32.31 81.48,32.51 81.18,32.51 U4.16 | 81.69,31.8 81.69,30.38 U4.1 | 83.41,30.38 83.92,30.89 U4.6 | 83.41,30.38 U4.5 | 83.41,30.38 83.41,31.8 | 83.41,31.8 83.41,33.12 U4.11 | 83.41,30.38 U4.5 | 83.41,31.8 81.69,31.8 | U3.6 83.92,22.05 83.41,21.54 U3.5 83.41,21.44 83.41,20.73 v83.52,20.62 | 81.69,22.25 81.69,23.47 81.58,23.57 81.18,23.57 U3.16 81.18,23.67 81.18,25.3 81.58,25.71 82.19,25.71 | 81.69,22.25 81.69,21.54 U3.1 | 82.19,25.71 82.8,25.71 83.31,25.2 83.31,24.28 U3.11 | 81.69,22.25 v81.99,22.25 | v81.38,27.74 81.89,27.74 83.31,29.16 83.31,30.28 U4.5 | 82.19,25.71 v82.19,26.31 | U2.11 76.91,33.12 76.91,32.72 76.81,32.61 74.88,32.61 U2.16 74.78,32.61 72.14,32.61 Q16.2 72.03,32.72 71.22,33.53 71.22,34.24 | 71.63,37.08 73.97,37.08 76.1,39.22 77.42,39.22 C1.2 | 71.63,37.08 71.22,36.68 71.22,34.24 | 77.01,30.89 77.52,30.89 U2.6 | 77.01,30.89 75.59,30.89 75.49,30.79 75.49,30.38 U2.1 75.39,30.28 74.07,28.96 72.14,28.96 Q15.2 72.03,28.96 72.03,29.67 70.71,30.99 70.71,32.21 70.31,32.61 68.38,32.61 Q12.2 | 77.01,30.89 77.01,30.38 | 77.01,30.38 U2.5 77.01,30.38 | v60.35,33.63 60.66,33.33 60.66,32.72 Q4.2 | v62.99,33.63 63.5,33.63 64.41,32.72 Q8.2 64.52,32.61 64.52,32.11 66.14,30.48 | 64.62,28.96 68.28,28.96 Q11.2 | 64.62,28.96 64.52,28.96 Q7.2 64.62,28.96 | 64.62,28.96 66.14,30.48 | 66.14,30.48 68.28,32.61 Q12.2 | 71.22,34.24 69.8,34.24 68.28,32.72 Q12.2 | 77.01,30.38 v79.35,28.04 | MEGA.GND@2 MEGA.GND@3 96.52,8.53 98.04,10.06 98.04,35.66 96.93,36.78 88.8,36.78 87.17,35.15 86.77,35.15 84.53,37.39 84.53,38.2 83.52,39.22 82.6,39.22 C2.2 82.5,39.32 80.16,39.32 78.54,40.95 71.53,40.95 70.81,41.66
  Top 0.102: U5.8 65.43,43.28 66.65,43.28 U5.7 66.75,43.28 67.87,43.28 U5.6 67.97,43.28 69.19,43.28 U5.5 69.29,43.18 70.81,41.66 | 71.63,37.08 71.63,39.22 70.81,40.03 70.81,41.66 | 26.72,50.49 MEGA.GND@4 26.72,50.49 | 26.72,50.49 30.58,46.63 41.35,46.63 U$1.OUT- | MEGA.GND@1 MEGA.GND@0 41.35,3.25 41.35,6.71 U$1.IN- 41.45,6.81 43.48,6.81 53.03,16.36 | 72.44,24.69 72.14,24.99 Q14.2 72.44,24.69 | 72.44,24.69 73.56,23.57 74.78,23.57 U1.16 74.88,23.67 75.08,23.88 75.08,25.2 75.59,25.71 v76.4,25.71 | 77.42,21.95 77.52,22.05 U1.6 | 77.42,21.95 77.01,21.54 U1.5 | 76.2,23.06 76.91,23.77 76.91,24.18 U1.11 | 76.2,23.06 75.49,22.35 75.49,21.54 U1.1 75.39,21.44 74.68,20.73 73.76,20.73 73.25,21.23 72.14,21.23 Q13.2 72.14,21.34 71.42,22.05 71.42,23.67 71.53,23.77 | 77.42,21.95 76.3,23.06 76.2,23.06 | 71.53,23.77 72.44,24.69 | 67.16,21.34 64.52,21.34 Q5.2 64.41,21.34 60.76,21.34 Q1.2 60.66,21.23 57.91,21.23 53.03,16.36 | 67.16,21.34 68.28,21.34 Q9.2 | 61.37,25.1 64.41,25.1 Q6.2 64.52,25.1 67.16,25.1 | 61.37,25.1 60.76,25.1 Q2.2 | 67.16,25.1 68.28,25.1 Q10.2 | 61.37,25.1 61.37,27.53 60.76,28.14 60.76,28.85 Q3.2 | 67.16,25.1 67.16,24.79 | 67.16,24.79 67.16,21.34 | 71.53,23.77 70.51,24.79 67.16,24.79 | 26.72,50.49 22.25,47.45 22.25,45.72 53.03,16.36
  Bottom 0.102: v83.52,20.62 81.99,22.15 v81.99,22.25 | v82.19,26.31 81.38,27.13 v81.38,27.74 80.77,28.35 79.65,28.35 v79.35,28.04 78.74,28.04 v76.4,25.71 | v62.99,33.63 v60.35,33.63
N$1  (via drill 0.25)  (1 unrouted)
  Top 0.102: v71.42,40.23 73.15,38.51 73.66,38.51 D1.A | v68.28,39.62 68.28,38.41 68.17,38.3 | 68.17,38.3 67.97,38.1 U5.3 68.17,38.3 | L1.P$2 65.13,38.1 65.33,38.3 68.17,38.3
  Top 0.203: U5.1 U5.2
  Bottom 0.102: v71.42,40.23 68.89,40.23 v68.28,39.62
SCK  (via drill 0.25)
  Top 0.102: v76.2,22.25 76.2,21.54 U1.3 | v82.8,20.12 82.8,20.83 82.6,21.03 82.6,21.44 U3.3 | U2.3 76.2,30.28 v76.2,28.96 76.2,28.14 74.57,26.52 74.57,25.4 74.78,25.2 74.78,24.79 v74.17,24.18 72.34,26.01 64.31,26.01 63.8,26.52 63.8,31.5 59.74,35.56 v59.74,35.87 | v82.3,28.96 82.5,29.16 82.5,30.28 U4.3 | MEGA.3 55.88,45.62 v56.9,44.6
  Bottom 0.102: v82.8,20.12 78.03,20.12 76.2,21.95 v76.2,22.25 75.79,22.25 74.17,23.88 v74.17,24.18 | v76.2,28.96 v82.3,28.96 | v56.9,44.6 56.9,38.71 v59.74,35.87
SI  (via drill 0.25)
  Top 0.102: v76.61,20.62 76.61,21.44 U1.4 | v79.05,20.73 v79.05,18.19 | v82.8,22.25 82.8,21.95 82.91,21.84 82.91,21.54 U3.4 | v78.23,28.35 76.61,29.97 76.61,30.28 U2.4 | v82.7,31.19 82.91,30.99 82.91,30.38 U4.4 | v61.37,49.28 64.41,46.23 65.02,46.23 66.04,45.21 70.61,45.21 71.83,43.99 v73.05,43.99 | v83.01,26.82 v84.23,26.82
  Bottom 0.102: v79.05,18.19 v76.61,20.62 | v79.05,20.73 79.65,20.73 81.79,22.86 82.19,22.86 82.6,22.45 | 82.6,22.45 v82.8,22.25 82.6,22.45 | v78.23,28.35 78.84,28.35 79.15,28.65 81.28,28.65 82.91,27.03 | 83.01,26.92 83.21,26.72 83.21,23.06 82.6,22.45 | 83.01,26.92 82.91,27.03 | v82.7,31.19 82.7,29.36 82.91,29.16 82.91,27.03 | MEGA.4 54.25,50.8 55.78,49.28 v61.37,49.28 | v73.05,43.99 73.05,41.96 77.52,37.49 77.52,36.68 78.94,35.26 81.89,35.26 84.02,33.12 84.02,27.03 v84.23,26.82 | 83.01,26.92 v83.01,26.82
VCC  (via drill 0.25)
  Top 0.102: v75.79,25.1 75.49,24.79 75.49,24.28 U1.15 | v81.79,25.1 81.79,24.28 U3.15 | 76.3,34.34 77.22,35.26 81.38,35.26 81.79,34.85 81.79,33.22 U4.15 | 76.3,34.34 76.1,34.14 | 76.1,34.14 75.49,33.53 75.49,33.22 U2.15 | 76.3,34.34 v76.2,34.34 76.1,34.14 | v66.24,45.82 75.69,45.82 79.45,42.06 82.5,42.06 C2.1 | 62.08,43.69 61.47,43.69 L1.P$1 | 62.08,43.69 v63.3,43.69 | v74.78,35.46 76.1,34.14 | v67.06,40.44 66.65,40.44 65.73,41.35 64.41,41.35 62.08,43.69 | 62.08,43.69 L1.P$1 | v51.41,33.53 51.41,34.95 54.56,38.1 VDD.1 54.66,38.1 59.74,43.18 L1.P$1
  Bottom 0.102: v81.79,25.1 v75.79,25.1 75.79,28.55 75.59,28.75 75.59,30.89 76.2,31.5 v76.2,34.34 | v66.24,45.82 65.43,45.82 v63.3,43.69 | v74.78,35.46 74.78,36.07 73.86,36.98 73.15,36.98 72.03,35.87 71.22,35.87 67.67,39.42 67.67,39.83 v67.06,40.44 | v51.41,33.53 27.64,18.19 U$1.IN+
VDD  (via drill 0.25)
  Top 0.102: 52.12,40.64 52.12,38.1 VDD.2 | 52.12,40.64 VDD.4 52.12,40.64 | 52.12,40.64 52.12,43.18 VDD.6 | U3.8 84.02,22.86 84.02,23.16 U3.9 | 84.02,32 84.02,32.11 U4.9 | 84.02,32 84.02,31.8 U4.8 | 84.02,32 86.36,29.67 86.36,25.2 84.43,23.27 84.02,23.27 U3.9 | U4.19 81.18,31.39 81.18,31.7 U4.18 81.08,31.8 77.62,31.8 | U3.19 81.18,22.55 81.18,22.86 U3.18 81.08,22.86 v80.37,22.86 | 77.62,31.8 77.62,32.11 U2.9 | 77.62,31.8 U2.8 | U1.8 77.62,22.86 77.62,23.16 U1.9 77.62,23.27 77.93,23.27 78.23,23.57 78.23,23.98 | U1.19 74.88,22.55 74.88,22.86 U1.18 74.78,22.86 v73.25,22.86 | 74.88,31.7 74.88,31.39 U2.19 | 74.88,31.7 U2.18 74.88,31.7 | 74.88,31.7 v75.59,31.7 77.52,31.7 U2.8 | 78.23,23.98 78.23,25.6 77.52,26.31 v75.18,26.31 | 78.23,23.98 v78.44,23.98 | 77.62,31.8 U2.8 | v82.6,23.27 83.92,23.27 U3.9 | v58.93,35.87 61.37,33.43 v61.37,31.7
  Bottom 0.102: 73.25,26.31 73.25,27.33 75.29,29.36 75.29,31.39 v75.59,31.7 75.59,32.51 74.07,34.04 72.85,34.04 68.28,29.46 65.94,29.46 63.7,31.7 v61.37,31.7 | 73.25,26.31 v73.25,22.86 | 73.25,26.31 v75.18,26.31 | 80.37,23.27 v80.37,22.86 | 80.37,23.27 79.65,23.98 v78.44,23.98 | 80.37,23.27 v82.6,23.27 | v58.93,35.87 54.66,35.87 52.43,38.1 52.12,38.1 VDD.2

## Text on the board
tPlace: boost | ext | vcc